# EAGLE board TC board (EAGLE 6.3)
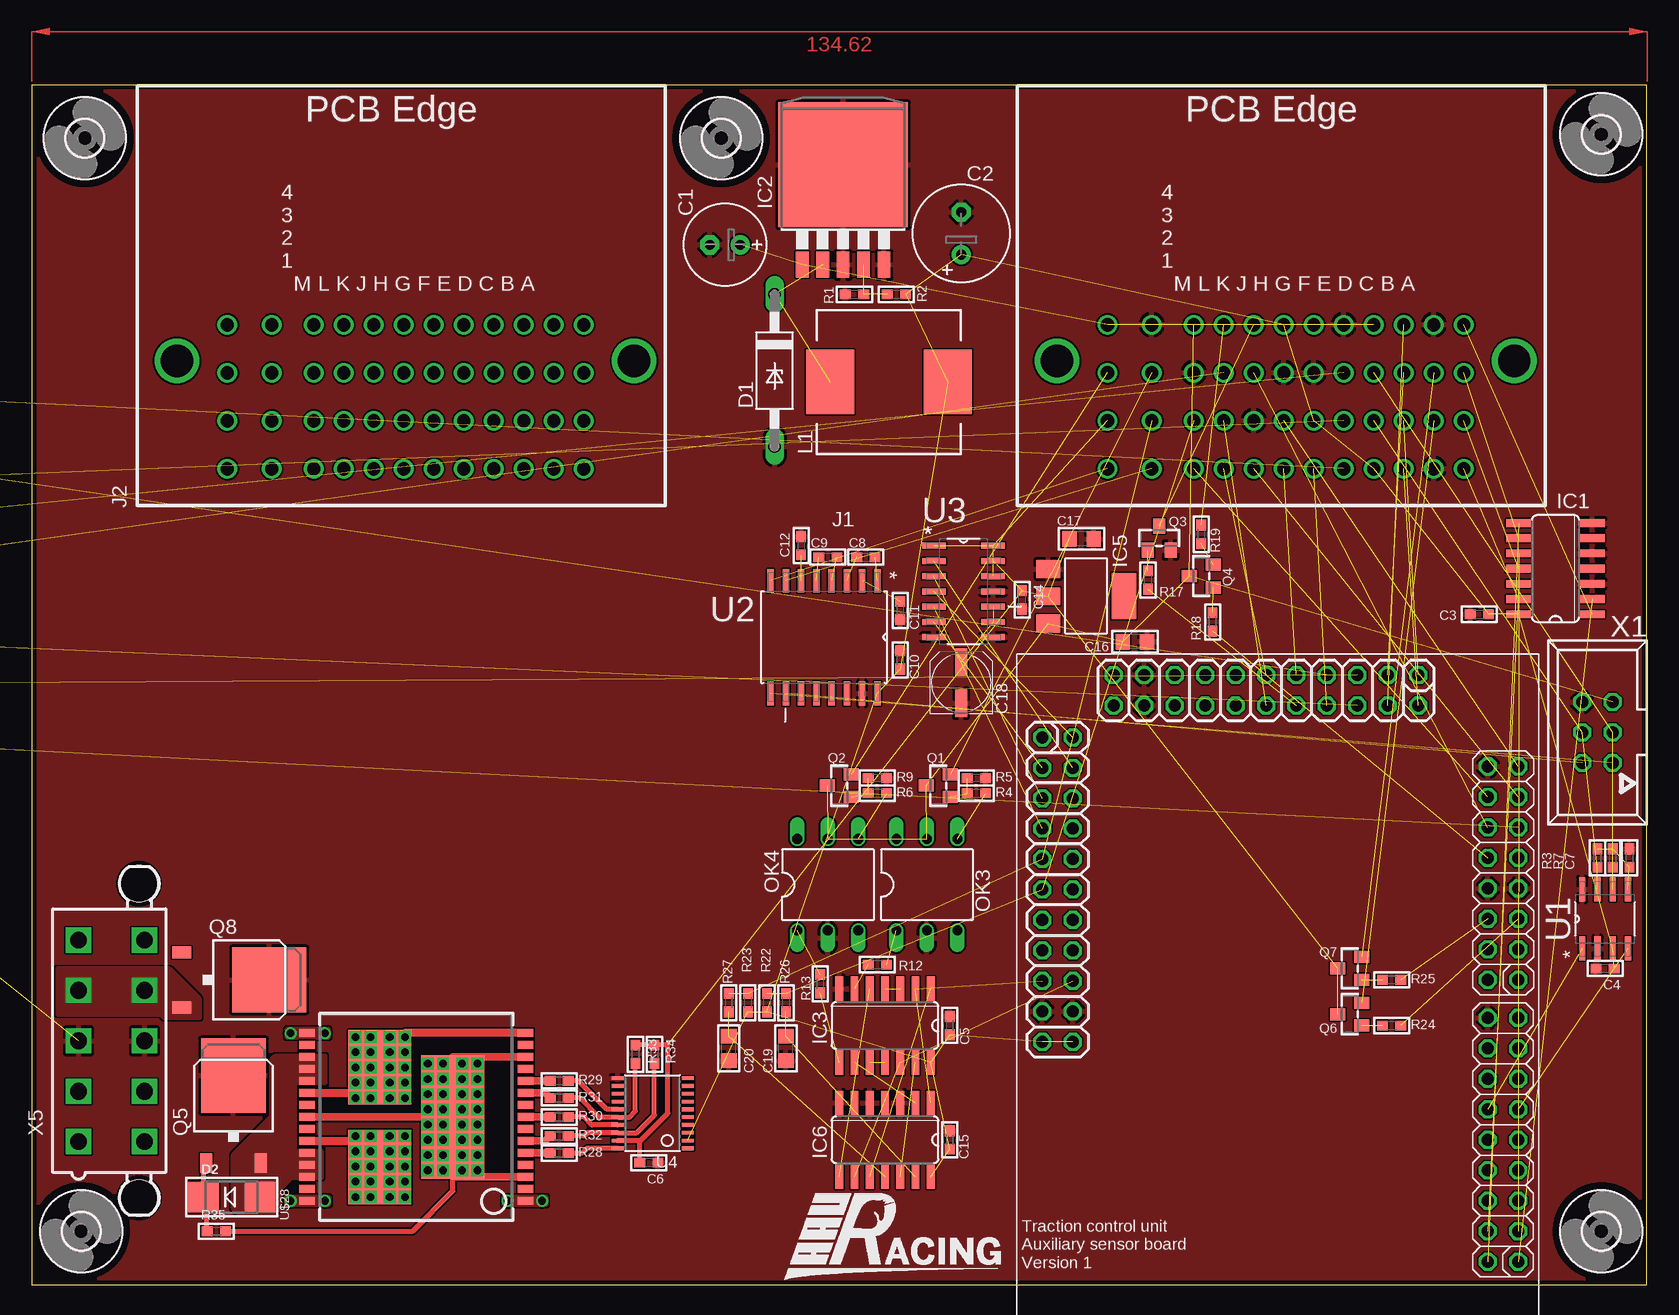
[diagram p0: board, top side]
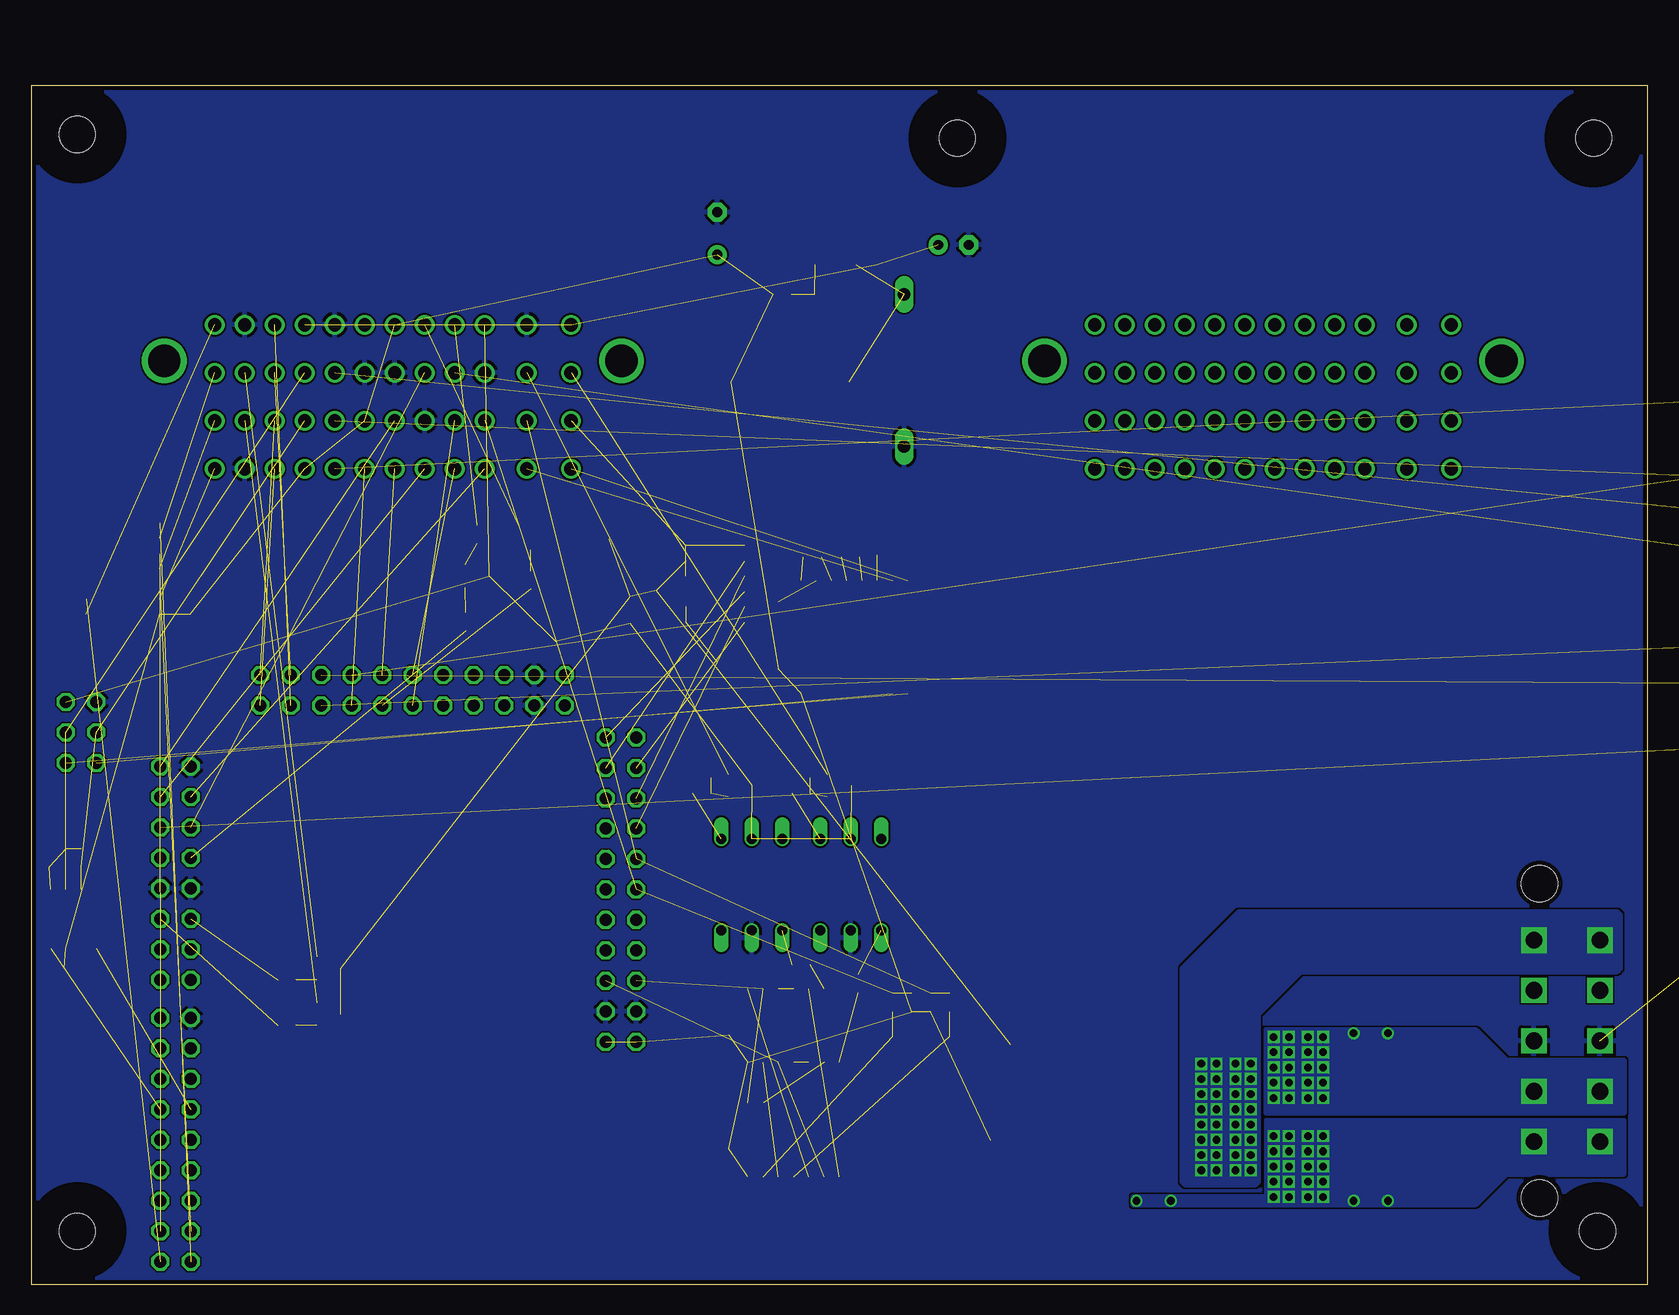
[diagram p1: board, bottom side, seen from below]

Size 134.6 x 100 mm. Coordinates in mm from the lower left corner, seen from the top.
Outline: 0,0 134.6,0 134.6,100 0,100 0,0
Copper layers (1*16): Top 0.0356mm / dielectric 1.5011mm / Bottom 0.0356mm
Design rules "LaenPCBOrder": minimum track width 6mil, minimum drill 13mil, track to track 6mil, track to pad 6mil, pad to pad 6mil, via to via 6mil, smd to smd 6mil, copper to edge 15mil, drill to drill 6mil, minimum pad ring 7mil, minimum via ring 7mil, stop-mask expansion 3mil, vias tented up to drill 0mil, thermal gap 10mil

## Footprints (pad centres in the part's own frame; a part is rotated, then mirrored left to right if it is on the bottom)
E2,5-7 = drill 0.813 pad 1.6: + -1.27,0 | drill 0.813 pad 1.6 octagon: - 1.27,0
E3,5-8 = drill 0.813 pad 1.6: + -1.778,0 | drill 0.813 pad 1.6 octagon: - 1.778,0
_0603 = smd 0.9 x 0.8: 1 -0.762,0; 2 0.762,0
_0805 = smd 1.2 x 1.3: 1 -1.016,0; 2 1.016,0
UD-5X5,8_NICHICON = smd 2.3 x 1: + 1.725,0; - -1.7,0
F126Z12 = drill 1.016 long: A 6.35,0; C -6.35,0
SMADIODE = smd 2.54 x 2.54: A 2.349,0; C -2.349,0
3,0 = hole 3: 0,0
SO14 = smd 0.66 x 2.032: 1 -3.81,-3.073; 2 -2.54,-3.073; 3 -1.27,-3.073; 4 0,-3.073; 5 1.27,-3.073; 6 2.54,-3.073; 7 3.81,-3.073; 8 3.81,3.073; 9 2.54,3.073; 10 1.27,3.073; 11 0,3.073; 12 -1.27,3.073; 13 -2.54,3.073; 14 -3.81,3.073
TO263-5 = smd 1.067 x 2.159: 1 -3.404,-5.791; 2 -1.702,-5.791; 3 0,-5.791; 4 1.702,-5.791; 5 3.404,-5.791 | smd 10.8 x 10.41: 6 0,2.54
SOT223 = smd 1.499 x 2.007: 1 -2.261,-3.15; 2 0.025,-3.15; 3 2.311,-3.15 | smd 3.81 x 2.007: 4 0,3.15
AUTOCONNECTOR = drill 1.1: A1 15.22,-6.92; A2 15.22,-2.92; A3 15.22,1.08; A4 15.22,5.08; B1 12.72,-6.92; B2 12.72,-2.92; B3 12.72,1.08; B4 12.72,5.08; C1 10.22,-6.92; C2 10.22,-2.92; C3 10.22,1.08; C4 10.22,5.08; D1 7.72,-6.92; D2 7.72,-2.92; D3 7.72,1.08; D4 7.72,5.08; E1 5.22,-6.92; E2 5.22,-2.92; E3 5.22,1.08; E4 5.22,5.08; F1 2.72,-6.92; F2 2.72,-2.92; F3 2.72,1.08; F4 2.72,5.08; G1 0.22,-6.92; G2 0.22,-2.92; G3 0.22,1.08; G4 0.22,5.08; H1 -2.28,-6.92; H2 -2.28,-2.92; H3 -2.28,1.08; H4 -2.28,5.08; J1 -4.78,-6.92; J2 -4.78,-2.92; J3 -4.78,1.08; J4 -4.78,5.08; K1 -7.28,-6.92; K2 -7.28,-2.92; K3 -7.28,1.08; K4 -7.28,5.08; L1 -10.78,-6.92; L2 -10.78,-2.92; L3 -10.78,1.08; L4 -10.78,5.08; M1 -14.48,-6.92; M2 -14.48,-2.92; M3 -14.48,1.08; M4 -14.48,5.08 | drill 2.7: SHIELD1 19.42,2.08; SHIELD2 -18.68,2.08
CDRH125 = smd 5.4 x 4: 1 0,4.9; 2 0,-4.9
DIL06 = drill 0.813 offset: 1 -2.54,-3.81; 2 0,-3.81; 3 2.54,-3.81; 4 2.54,3.81; 5 0,3.81; 6 -2.54,3.81
SOT23-WIDE = smd 1 x 1.27: 1 -0.95,-1; 2 0.95,-1; 3 0,1
D-PAK_TO252AA = smd 1 x 1.6: 1 -2.28,-4.8; 3 2.28,-4.8 | smd 5.4 x 6.2: 4 0,2.5
SOIC127P600X175-8N = smd 1.981 x 0.533: 1 -2.464,1.905; 2 -2.464,0.635; 3 -2.464,-0.635; 4 -2.464,-1.905; 5 2.464,-1.905; 6 2.464,-0.635; 7 2.464,0.635; 8 2.464,1.905
SOIC127P1032X265-16N = smd 1.981 x 0.533: 1 -4.699,4.445; 2 -4.699,3.175; 3 -4.699,1.905; 4 -4.699,0.635; 5 -4.699,-0.635; 6 -4.699,-1.905; 7 -4.699,-3.175; 8 -4.699,-4.445; 9 4.699,-4.445; 10 4.699,-3.175; 11 4.699,-1.905; 12 4.699,-0.635; 13 4.699,0.635; 14 4.699,1.905; 15 4.699,3.175; 16 4.699,4.445
SOIC127P600X175-14N = smd 1.981 x 0.508: 1 -2.464,3.81; 2 -2.464,2.54; 3 -2.464,1.27; 4 -2.464,0; 5 -2.464,-1.27; 6 -2.464,-2.54; 7 -2.464,-3.81; 8 2.464,-3.81; 9 2.464,-2.54; 10 2.464,-1.27; 11 2.464,0; 12 2.464,1.27; 13 2.464,2.54; 14 2.464,3.81
TSSOP20 = smd 0.305 x 0.991: 1 -2.925,-2.918; 2 -2.275,-2.918; 3 -1.625,-2.918; 4 -0.975,-2.918; 5 -0.325,-2.918; 6 0.325,-2.918; 7 0.975,-2.918; 8 1.625,-2.918; 9 2.275,-2.918; 10 2.925,-2.918; 11 2.925,2.918; 12 2.275,2.918; 13 1.625,2.918; 14 0.975,2.918; 15 0.325,2.918; 16 -0.325,2.918; 17 -0.975,2.918; 18 -1.625,2.918; 19 -2.275,2.918; 20 -2.925,2.918
CPU-BOARD-JP1 = drill 1 octagon: P$1 1.27,-12.7; P$2 -1.27,-12.7; P$3 1.27,-10.16; P$4 -1.27,-10.16; P$5 1.27,-7.62; P$6 -1.27,-7.62; P$7 1.27,-5.08; P$8 -1.27,-5.08; P$9 1.27,-2.54; P$10 -1.27,-2.54; P$11 1.27,0; P$12 -1.27,0; P$13 1.27,2.54; P$14 -1.27,2.54; P$15 1.27,5.08; P$16 -1.27,5.08; P$17 1.27,7.62; P$18 -1.27,7.62; P$19 1.27,10.16; P$20 -1.27,10.16; P$21 1.27,12.7; P$22 -1.27,12.7; P$23 -3.905,18.637; P$24 -3.905,16.097; P$25 -6.445,18.637; P$26 -6.445,16.097; P$27 -8.985,18.637; P$28 -8.985,16.097; P$29 -11.525,18.637; P$30 -11.525,16.097; P$31 -14.065,18.637; P$32 -14.065,16.097; P$33 -16.605,18.637; P$34 -16.605,16.097; P$35 -19.145,18.637; P$36 -19.145,16.097; P$37 -21.685,18.637; P$38 -21.685,16.097; P$39 -24.225,18.637; P$40 -24.225,16.097; P$41 -26.765,18.637; P$42 -26.765,16.097; P$43 -29.305,18.637; P$44 -29.305,16.097; P$45 -47.625,-21.018; P$46 -47.625,-18.479; P$47 -45.085,-21.018; P$48 -45.085,-18.479; P$49 -42.545,-21.018; P$50 -42.545,-18.479; P$51 -40.005,-21.018; P$52 -40.005,-18.479; P$53 -37.465,-21.018; P$54 -37.465,-18.479; P$55 -34.925,-21.018; P$56 -34.925,-18.479; P$57 -32.385,-21.018; P$58 -32.385,-18.479; P$59 -29.845,-21.018; P$60 -29.845,-18.479; P$61 -27.305,-21.018; P$62 -27.305,-18.479; P$63 -24.115,-21.024; P$64 -24.115,-18.484; P$65 -21.575,-21.024; P$66 -21.575,-18.484; P$67 -19.035,-21.024; P$68 -19.035,-18.484; P$69 -16.495,-21.024; P$70 -16.495,-18.484; P$71 -13.955,-21.024; P$72 -13.955,-18.484; P$73 -11.415,-21.024; P$74 -11.415,-18.484; P$75 -8.875,-21.024; P$76 -8.875,-18.484; P$77 -6.335,-21.024; P$78 -6.335,-18.484
VNH2SP30 = smd 0.67 x 1.3: 1 -7,-9.1; 2 -6,-9.1; 3 -5,-9.1; 4 -4,-9.1; 5 -3,-9.1; 6 -2,-9.1; 7 -1,-9.1; 8 0,-9.1; 9 1,-9.1; 10 2,-9.1; 11 3,-9.1; 12 4,-9.1; 13 5,-9.1; 14 6,-9.1; 15 7,-9.1; 16 7,9.1; 17 6,9.1; 18 5,9.1; 19 4,9.1; 20 3,9.1; 21 2,9.1; 22 1,9.1; 23 0,9.1; 24 -1,9.1; 25 -2,9.1; 26 -3,9.1; 27 -4,9.1; 28 -5,9.1; 29 -6,9.1; 30 -7,9.1 | smd 10.3 x 5.25: SLUG1 0,-3.05 | smd 6.23 x 5.25: SLUG2 4.165,3.05; SLUG3 -4.165,3.05
057-006-1 = drill 1 octagon: 1 -2.54,-1.27; 2 -2.54,1.27; 3 0,-1.27; 4 0,1.27; 5 2.54,-1.27; 6 2.54,1.27
5566-10 = drill 1.4 square: 1 8.4,-2.75; 2 4.2,-2.75; 3 0,-2.75; 4 -4.2,-2.75; 5 -8.4,-2.75; 6 8.4,2.75; 7 4.2,2.75; 8 0,2.75; 9 -4.2,2.75; 10 -8.4,2.75 | hole 3: 13.1,2.29; -13.1,2.29

## Placement (x,y rotation side)
C1  100u  [E2,5-7]  57.78,86.68 180 top
C2  220uf  [E3,5-8]  77.47,87.63 90 top
C3  100n  [_0603]  120.65,55.88 180 top
C4  100n  [_0603]  131.13,26.35 180 top
C5  100n  [_0603]  76.52,21.59 90 top
C6  100n  [_0603]  51.44,10.16 180 top
C7  4n7  [_0603]  133.16,35.56 90 top
C8  100n  [_0603]  69.53,60.64 180 top
C9  100n  [_0603]  66.36,60.64 180 top
C10  100n  [_0603]  72.39,52.07 270 top
C11  100n  [_0603]  72.39,56.2 270 top
C12  100n  [_0603]  64.13,61.59 270 top
C14  100n  [_0603]  82.55,57.09 270 top
C15  100n  [_0603]  76.52,12.07 90 top
C16  10u  [_0805]  91.95,53.59 180 top
C17  22u  [_0805]  87.5,62.17 180 top
C18  33uf pan FC  [UD-5X5,8_NICHICON]  77.47,50.17 90 top
C19  100n  [_0805]  62.87,19.68 90 top
C20  100n  [_0805]  58.1,19.68 90 top
D1  1n5824  [F126Z12]  61.91,76.2 270 top
D2  [SMADIODE]  16.67,7.3 0 top
H1  MOUNT-HOLE3.0  [3,0]  130.81,95.89 0 top
H2  MOUNT-HOLE3.0  [3,0]  57.47,95.57 0 top
H3  MOUNT-HOLE3.0  [3,0]  -13.65,-13.97 0 top  (outside the outline)
H4  MOUNT-HOLE3.0  [3,0]  130.81,4.45 0 top
H5  MOUNT-HOLE3.0  [3,0]  4.13,4.45 0 top
H6  MOUNT-HOLE3.0  [3,0]  -18.1,-4.44 0 top  (outside the outline)
H7  MOUNT-HOLE3.0  [3,0]  4.44,95.57 0 top
IC1  74HC14D  [SO14]  127,59.69 90 top
IC2  lm2575  [TO263-5]  67.63,90.81 0 top
IC3  74AC08D  [SO14]  71.12,21.59 180 top
IC5  REG1117  [SOT223]  87.88,57.4 270 top
IC6  74AC14D  [SO14]  71.12,12.07 180 top
J1  CON1  [AUTOCONNECTOR]  104.14,74.93 0 top
J2  CON1  [AUTOCONNECTOR]  30.8,74.93 0 top
L1  MSS1278-224KLD  [CDRH125]  71.44,75.25 90 top
OK3  4N37  [DIL06]  74.61,33.34 0 top
OK4  4N37  [DIL06]  66.36,33.34 0 top
Q1  [SOT23-WIDE]  75.56,41.59 90 top
Q2  [SOT23-WIDE]  67.31,41.59 90 top
Q3  [SOT23-WIDE]  93.98,62.23 0 top
Q4  [SOT23-WIDE]  97.47,59.06 90 top
Q5  IRFR3707ZR  [D-PAK_TO252AA]  16.83,14.92 0 top
Q6  [SOT23-WIDE]  109.85,22.54 90 top
Q7  [SOT23-WIDE]  109.85,26.35 90 top
Q8  IRFR3707ZR  [D-PAK_TO252AA]  17.3,25.4 270 top
R1  1k  [_0603]  68.58,82.55 0 top
R2  1k69  [_0603]  72.07,82.55 180 top
R3  60  [_0603]  130.49,35.56 90 top
R4  200  [_0603]  78.74,40.96 0 top
R5  1000  [_0603]  78.74,42.23 0 top
R6  200  [_0603]  70.48,40.96 0 top
R7  60  [_0603]  131.76,35.56 90 top
R8  715  [_0603]  -27.3,74.77 0 top  (outside the outline)
R9  1000  [_0603]  70.48,42.23 0 top
R10  221  [_0603]  -27.3,70.64 0 top  (outside the outline)
R11  715  [_0603]  -27.3,66.52 0 top  (outside the outline)
R12  200  [_0603]  70.48,26.67 180 top
R13  200  [_0603]  65.72,25.08 270 top
R14  715  [_0603]  -27.3,62.39 0 top  (outside the outline)
R15  715  [_0603]  -27.3,58.26 0 top  (outside the outline)
R16  221  [_0603]  -27.3,54.13 0 top  (outside the outline)
R17  500  [_0603]  93.03,58.74 270 top
R18  500  [_0603]  98.43,55.25 270 top
R19  100k  [_0603]  97.47,62.55 90 top
R20  221  [_0603]  -27.3,50.01 0 top  (outside the outline)
R21  221  [_0603]  -27.3,45.88 0 top  (outside the outline)
R22  500  [_0603]  61.28,23.5 270 top
R23  500  [_0603]  59.69,23.5 270 top
R24  500  [_0603]  113.35,21.59 0 top
R25  500  [_0603]  113.35,25.4 0 top
R26  500  [_0603]  62.87,23.5 270 top
R27  500  [_0603]  58.1,23.5 270 top
R28  1k  [_0603]  43.97,10.95 0 top
R29  1k  [_0603]  43.97,16.99 0 top
R30  1k  [_0603]  43.97,13.97 0 top
R31  1k  [_0603]  43.97,15.56 180 top
R32  1k  [_0603]  43.97,12.38 180 top
R33  1k  [_0603]  50.32,19.21 270 top
R34  1k  [_0603]  51.91,19.21 270 top
R35  100k  [_0603]  15.4,4.45 0 top
U1  MAX13052ESA+  [SOIC127P600X175-8N]  131.13,30.48 90 top
U2  MAX232AEWE+  [SOIC127P1032X265-16N]  66.04,53.98 270 top
U3  MAX531AESD+  [SOIC127P600X175-14N]  77.66,57.79 0 top
U4  [TSSOP20]  51.75,14.29 90 top
U$1  CPU-BOARD  [CPU-BOARD-JP1]  102.87,49.53 90 top
U$28  VNH2SP30  [VNH2SP30]  32.07,13.97 90 top
X1  057-006-1  [057-006-1]  130.49,46.04 90 top
X5  5566-10  [5566-10]  6.67,20.32 270 top

## Library data of the parts
C1 C2 C18 = rcl
C3-C12 C14-C17 C19 C20 D2 Q1-Q4 Q6 Q7 R1-R35 = microbuilder
D1 = diode
H1-H7 = holes
IC1 IC3 IC6 = 74xx-eu
IC2 = linear
IC5 = burr-brown; MPN: REG1117; OC_FARNELL: 1097566; OC_NEWARK: 14P6981
J1 J2 U$1 = unicorn_v2
L1 = SparkFun-Passives
OK3 OK4 = optocoupler; MF: FAIRCHILD SEMICONDUCTOR; MPN: 4N37; OC_FARNELL: 1612456; OC_NEWARK: 72K9948
Q5 Q8 = UNICORN
U1 = Maxim_By_element14_Batch_1; MPN: MAX13052ESA+; OC_FARNELL: 1600112; OC_NEWARK: 99K2875; PACKAGE: SOIC-8; SUPPLIER: Maxim
U2 = Maxim_By_element14_Batch_1; MPN: MAX232AEWE+; OC_FARNELL: 9724400; OC_NEWARK: 67K4435; PACKAGE: SOIC-16; SUPPLIER: Maxim
U3 = Maxim_By_element14_Batch_1; MPN: MAX531AESD+; OC_FARNELL: -; OC_NEWARK: 23K6158; PACKAGE: SOIC-14; SUPPLIER: Maxim
U4 = adafruit
U$28 = SparkFun-PowerIC
X1 = con-panduit; OC_FARNELL: unknown; OC_NEWARK: unknown
X5 = con-molex; OC_FARNELL: unknown; OC_NEWARK: unknown

## Nets
3.3V: C2.+ C3.1 C4.1 C5.1 C10.2 C15.1 IC1.14 IC3.14 IC6.14 J1.D1 J1.D4 J1.F2 J1.G4 L1.2 R2.1 R22.2 R23.2 U1.3 U2.16 U4.2 U$1.P$43 U$1.P$44
5.0V: C6.2 C14.1 C17.2 IC5.2 Q6.3 Q7.3 R33.1 R34.1 U3.13 U4.19
12V: C1.+ C16.2 IC2.1 IC5.3 J1.F4 J1.K4 J1.M4 OK3.5 OK4.5 Q1.3 Q2.3 Q4.3 X1.5
BITE: J1.E3 R14.2
BITEO: R14.1 R20.2 U$1.P$5
BRAKE-POT: J1.F1 U$1.P$8
BRAKEP: J1.K1 U$1.P$76
CAN_RX: U1.4 U$1.P$55
CAN_TX: U1.1 U$1.P$56
CANH: J1.D3 R7.1 U1.6 X1.3
CANL: J1.D2 R3.1 U1.7 X1.4
CLUTCH-POT: J1.G1 U$1.P$9
COMRX: U2.9 X1.1
COMTX: U2.10 X1.2
CVVM: U$28.15 U$28.16 U$28.21 U$28.SLUG2 X5.2 X5.7
DACCLR: U3.3 U$1.P$27
DACCS: U3.5 U$1.P$29
DIRA: IC3.2 IC6.1 U$1.P$39
DIRAO: J1.L3 Q1.2
DIRASENSE: J1.L2 R23.1 R27.1 U$1.P$31
DIRB: IC3.12 IC6.9 U$1.P$40
DIRBO: J1.M3 Q2.2
DIRBSENSE: J1.K2 R22.1 R26.1 U$1.P$33
ECU1: J1.B2 Q6.2
ECU1L: R24.2 U$1.P$67
ECU2: J1.B3 Q7.2
ECU2L: R25.2 U$1.P$68
EN1H: R32.1 R34.2 U4.18
EN2H: R31.1 R33.2 U4.16
FUEL-RECIEVE: J1.J3 R15.2
FUEL-RECIEVEI: R15.1 R21.2 U$1.P$73
FUEL-SEND: R18.2 U$1.P$72
FUEL-SENDO: Q4.2 R19.1
GND: C1.- C2.- C3.2 C4.2 C5.2 C6.1 C7.2 C10.1 C11.2 C12.1 C14.2 C15.2 C16.1 C17.1 C18.- C19.1 C20.1 D1.A IC1.3 IC1.5 IC1.7 IC2.3 IC2.5 IC2.6 IC3.7 IC5.1 IC6.3 IC6.5 IC6.7 J1.B1 J1.B4 J1.E4 J1.F3 J1.G3 J1.H2 J1.K3 J1.L4 OK3.2 OK4.2 Q3.2 Q5.4 Q8.4 R1.1 R5.2 R9.2 R10.1 R16.1 R20.1 R21.1 U1.2 U1.8 U2.15 U3.7 U3.8 U3.11 U4.11 U$1.P$19 U$1.P$20 U$1.P$41 U$1.P$42 U$1.P$62 U$1.P$69 U$1.P$70 U$1.P$78 X1.6 X5.3 X5.8
GNDM: Q8.3 X5.4 X5.9
GNDS: D2.A Q5.3 U$28.18 U$28.19 U$28.20 U$28.26 U$28.27 U$28.28
GSENS: J1.E1 R8.2
GSENSO: R8.1 R10.2 U$1.P$7
IGNCUT: R17.2 U$1.P$10
IGNCUTO: J1.H4 Q3.3
MISO: U3.6 U$1.P$25
MOSI: U3.2 U$1.P$26
N$1: IC2.4 R1.2 R2.2
N$2: D1.C IC2.2 L1.1
N$3: IC1.9 J1.A3
N$4: IC1.13 J1.A1
N$5: IC1.1 J1.A4
N$6: IC1.11 J1.A2
N$7: OK3.4 R4.2
N$8: Q1.1 R4.1 R5.1
N$9: OK4.4 R6.2
N$10: Q2.1 R6.1 R9.1
N$11: IC3.8 R13.2
N$12: C7.1 R3.2 R7.2 U1.5
N$13: C12.2 U2.6
N$14: C9.1 U2.4
N$15: IC3.9 IC6.2
N$16: IC3.5 IC6.8
N$17: OK4.1 R13.1
N$18: OK3.1 R12.1
N$19: IC3.6 R12.2
N$20: C9.2 U2.5
N$21: C8.2 U2.3
N$22: C8.1 U2.1
N$23: C11.1 U2.2
N$24: Q3.1 R17.1
N$25: J1.J4 R19.2
N$26: Q4.1 R18.1
N$28: R30.1 U$28.8
N$29: IC3.3 IC3.4
N$30: IC3.10 IC3.11
N$31: IC3.13 IC6.12
N$32: IC3.1 IC6.10
N$33: C20.2 IC6.11 R27.2
N$34: Q6.1 R24.1
N$35: Q7.1 R25.1
N$36: C19.2 IC6.13 R26.2
N$38: R29.1 U$28.11
N$39: R28.1 U$28.5
N$40: R31.2 U$28.10
N$41: R32.2 U$28.6
N$45: D2.C Q5.1 R35.1
N$71: R28.2 U4.20
N$72: R29.2 U4.15
N$73: R30.2 U4.17
NEUTRAL: J1.J1 U$1.P$11
OILP: J1.J2 U$1.P$12
OUTA: U$28.1 U$28.25 U$28.30 U$28.SLUG3 X5.1 X5.6
REF: C18.+ U3.9 U3.10
RPM1: IC1.2 U$1.P$45
RPM2: IC1.8 U$1.P$46
RPM3: IC1.10 U$1.P$47
RPM4: IC1.12 U$1.P$48
RS232RX: J1.M1 U2.8
RS232TX: J1.L1 U2.7
SCK: U3.4 U$1.P$24
SPEED: J1.G2 U$1.P$77
TRAVEL1: J1.C2 U$1.P$1
TRAVEL2: J1.C1 U$1.P$2
TRAVEL3: J1.C3 U$1.P$3
TRAVEL4: J1.C4 U$1.P$4
VCCM: R35.2 U$28.3 U$28.13 U$28.23 U$28.SLUG1 X5.5 X5.10
VOUT: J1.M2 U3.1 U3.12 U3.14
VTEMP: J1.H1 U$1.P$75
VTEMP2: J1.H3 U$1.P$74
YAW: J1.E2 R11.2
YAWO: R11.1 R16.2 U$1.P$6

## Tracks (layer width: path | path; a pad name or v marks a point on that pad's centre or on a via)
3.3V  (21 unrouted)
5.0V  (6 unrouted)
  Top 0.406: U4.19 50.75,12.01 | 50.75,12.01 53.02,14.29 53.02,20 51.94,20 R34.1 R33.1 | C6.2 50.67,11.94 50.75,12.01
12V  (12 unrouted)
BITE  (1 unrouted)
BITEO  (2 unrouted)
BRAKE-POT  (1 unrouted)
BRAKEP  (1 unrouted)
CAN_RX  (1 unrouted)
CAN_TX  (1 unrouted)
CANH  (3 unrouted)
CANL  (3 unrouted)
CLUTCH-POT  (1 unrouted)
COMRX  (1 unrouted)
COMTX  (1 unrouted)
CVVM  (via drill 0.64)
  Top 0.686: U$28.21 28.26,15.97 v28.26,15.56 | v28.26,18.1 29.02,18.1 U$28.SLUG2 | U$28.15 31.11,20.97 v31.11,20.64
  other vias: 26.99,15.56 26.99,18.1 26.99,16.83 28.26,16.83 28.26,19.37 26.99,19.37 26.99,20.64 28.26,20.64 29.84,20.64 29.84,19.37 29.84,18.1 29.84,16.83 29.84,15.56 31.11,15.56 31.11,16.83 31.11,18.1 31.11,19.37 24.45,20.96 21.59,20.96
  pour Bottom (no thermals): 1.91,14.29 31.75,14.29 31.75,21.27 14.29,21.27 11.75,18.73 1.91,18.73
  pour Top (no thermals): 21.27,20.64 24.77,20.64 24.77,21.27 21.27,21.27
DACCLR  (1 unrouted)
DACCS  (1 unrouted)
DIRA  (2 unrouted)
DIRAO  (1 unrouted)
DIRASENSE  (3 unrouted)
DIRB  (2 unrouted)
DIRBO  (1 unrouted)
DIRBSENSE  (3 unrouted)
ECU1  (1 unrouted)
ECU1L  (1 unrouted)
ECU2  (1 unrouted)
ECU2L  (1 unrouted)
EN1H
  Top 0.406: R32.1 46.04,12.38 46.32,12.66 U4.18 50.44,12.66 51.91,14.13 R34.2
EN2H
  Top 0.406: R31.1 45.72,15.56 47.32,13.96 U4.16 49.84,13.96 50.32,14.45 R33.2
FUEL-RECIEVE  (1 unrouted)
FUEL-RECIEVEI  (2 unrouted)
FUEL-SEND  (1 unrouted)
FUEL-SENDO  (1 unrouted)
GND  (4 unrouted)
  pour Bottom (rank 6): 0,0 134.62,0 134.62,100.33 0,100.33
  pour Top (rank 6): 0,0 134.62,0 134.62,100.33 0,100.33
GNDM
  pour Top (no thermals): 2.22,22.54 2.22,26.35 11.43,26.35 13.97,23.81 13.97,22.22 11.11,22.22 10.8,22.54
GNDS
  pour Top (no thermals): 20.32,19.05 24.45,19.05 24.45,16.83 21.91,16.83 21.91,11.11 24.13,11.11 24.13,8.89 21.59,8.89 20.64,7.94 20.64,6.35 20.32,6.03 17.14,6.03 16.83,6.35 16.83,10.8 20,13.97 20,18.73
GSENS  (1 unrouted)
GSENSO  (2 unrouted)
IGNCUT  (1 unrouted)
IGNCUTO  (1 unrouted)
MISO  (1 unrouted)
MOSI  (1 unrouted)
N$1  (2 unrouted)
N$2  (2 unrouted)
N$3  (1 unrouted)
N$4  (1 unrouted)
N$5  (1 unrouted)
N$6  (1 unrouted)
N$7  (1 unrouted)
N$8  (2 unrouted)
N$9  (1 unrouted)
N$10  (2 unrouted)
N$11  (1 unrouted)
N$12  (3 unrouted)
N$13  (1 unrouted)
N$14  (1 unrouted)
N$15  (1 unrouted)
N$16  (1 unrouted)
N$17  (1 unrouted)
N$18  (1 unrouted)
N$19  (1 unrouted)
N$20  (1 unrouted)
N$21  (1 unrouted)
N$22  (1 unrouted)
N$23  (1 unrouted)
N$24  (1 unrouted)
N$25  (1 unrouted)
N$26  (1 unrouted)
N$28
  Top 0.61: U$28.8 R30.1
N$29  (1 unrouted)
N$30  (1 unrouted)
N$31  (1 unrouted)
N$32  (1 unrouted)
N$33  (2 unrouted)
N$34  (1 unrouted)
N$35  (1 unrouted)
N$36  (2 unrouted)
N$38
  Top 0.61: U$28.11 43.21,16.97 R29.1
N$39
  Top 0.61: U$28.5 43.2,10.97 R28.1
N$40
  Top 0.61: U$28.10 42.8,15.97 R31.2
N$41
  Top 0.61: U$28.6 42.8,11.97 R32.2
N$45
  Top 0.406: 14.55,10.19 Q5.1 14.32,10.12 D2.C 14.32,6.67 14.61,6.67 14.61,4.44 R35.1
N$71
  Top 0.406: U4.20 46.29,11.36 45.88,10.95 R28.2
N$72
  Top 0.406: U4.15 47.94,14.61 45.56,16.99 R29.2
N$73
  Top 0.406: U4.17 46.69,13.31 46.04,13.97 R30.2
NEUTRAL  (1 unrouted)
OILP  (1 unrouted)
OUTA  (via drill 0.64)
  Top 0.686: U$28.25 28.26,11.97 v28.26,12.38 | U$28.SLUG3 28.26,9.8 v28.26,9.84
  other vias: 26.99,12.38 29.84,12.38 31.11,12.38 26.99,11.11 28.26,11.11 29.84,11.11 31.11,11.11 31.11,9.84 29.84,9.84 26.99,9.84 26.99,8.57 28.26,8.57 29.84,8.57 31.11,8.57 26.99,7.3 28.26,7.3 29.84,7.3 31.11,7.3 39.69,6.98 42.54,6.98 24.45,6.98 21.59,6.98
  pour Bottom (no thermals): 1.91,13.65 31.75,13.65 31.75,7.3 42.86,7.3 42.86,6.67 14.29,6.67 11.75,9.21 1.91,9.21
  pour Top (no thermals): 39.37,7.3 42.86,7.3 42.86,6.67 39.37,6.67
  pour Top (no thermals): 21.27,7.3 24.77,7.3 24.77,6.67 21.27,6.67
REF  (2 unrouted)
RPM1  (1 unrouted)
RPM2  (1 unrouted)
RPM3  (1 unrouted)
RPM4  (1 unrouted)
RS232RX  (1 unrouted)
RS232TX  (1 unrouted)
SCK  (1 unrouted)
SPEED  (1 unrouted)
TRAVEL1  (1 unrouted)
TRAVEL2  (1 unrouted)
TRAVEL3  (1 unrouted)
TRAVEL4  (1 unrouted)
VCCM  (via drill 0.64)
  Top 0.406: R35.2 31.75,4.44 35.12,7.81 35.12,9.53
  Top 0.61: U$28.23 U$28.SLUG1 | U$28.13 35.12,18.97 U$28.SLUG1 | U$28.3 35.12,8.97 35.12,9.53 U$28.SLUG1
  Top 0.686: v35.88,9.53 35.12,9.53
  other vias: 33.02,18.42 34.29,18.42 37.15,18.42 35.88,18.42 33.02,9.53 34.29,9.53 37.15,9.53 33.02,10.8 33.02,17.14 33.02,15.88 33.02,14.61 33.02,12.07 33.02,13.34 34.29,10.8 34.29,12.07 34.29,13.34 34.29,14.61 34.29,15.88 34.29,17.14 35.88,17.14 35.88,15.88 35.88,14.61 35.88,13.34 35.88,12.07 35.88,10.8 37.15,10.8 37.15,12.07 37.15,13.34 37.15,14.61 37.15,15.88 37.15,17.14
  pour Bottom (no thermals): 2.22,30.8 2.22,26.35 2.54,26.04 28.89,26.04 32.38,22.54 32.38,8.57 32.7,8.26 38.42,8.26 38.73,8.57 38.73,26.35 33.97,31.11 2.54,31.11
VOUT  (3 unrouted)
VTEMP  (1 unrouted)
VTEMP2  (1 unrouted)
YAW  (1 unrouted)
YAWO  (2 unrouted)
(copper drawn outside any net)
  shapes: Top area x1

## Text on the board
tSilk: Traction control unit / Auxiliary sensor board / Version 1